# Altium PCB SUNNYMultiAnalyzor.PcbDoc
Units mm, origin at the board's own origin, x right, y up, seen from the top; angles counter-clockwise.
Board outline 150 x 150 mm, 2 copper layers (Top Layer, Bottom Layer); 102 components, 77 nets, 351 pads, 32 vias.
Unrouted connection lines stored in the file: 202.
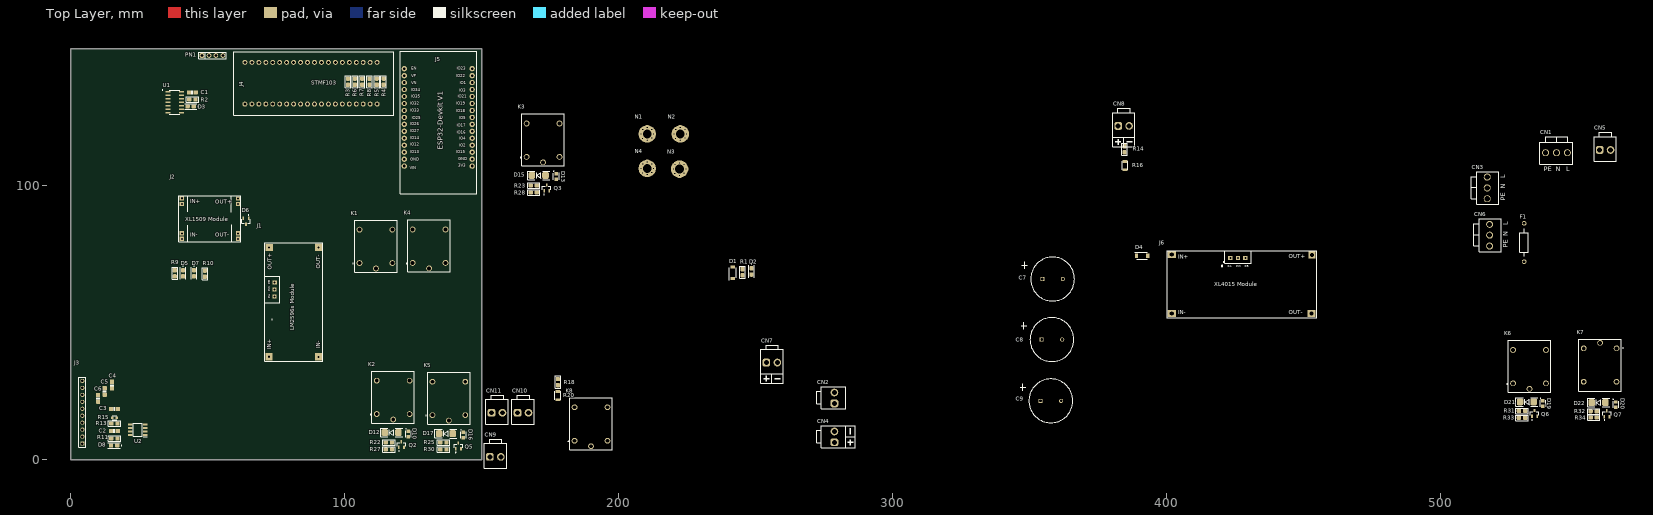
[diagram p0: Top Layer view]
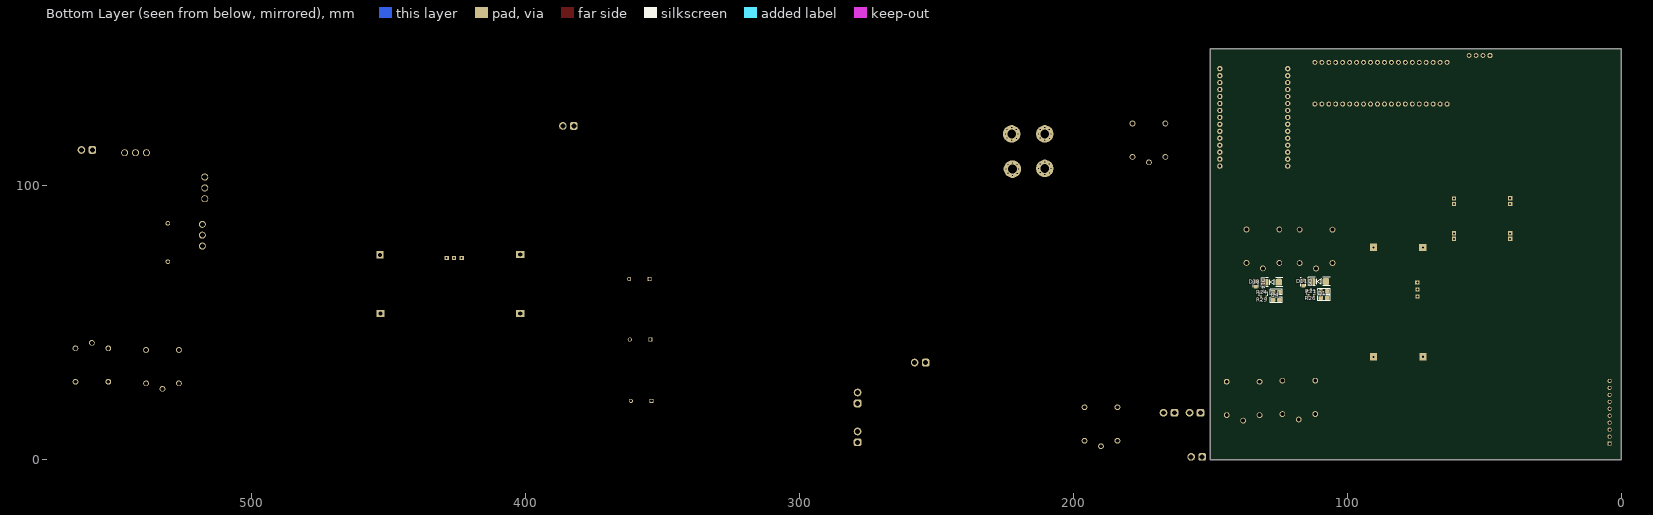
[diagram p1: Bottom Layer view, seen from below]

## Layer stack, top to bottom
Top Solder: solder mask 0.0102, Solder Resist, Dk 3.5
Top Layer: signal copper 0.0356
Dielectric 1: dielectric 0.32, FR-4, Dk 4.8
Bottom Layer: signal copper 0.0356
Bottom Solder: solder mask 0.0102, Solder Resist, Dk 3.5

## Board outline
0,0 150,0 150,150 0,150

## Design rules (kind name [scope] priority, off if disabled: settings)
Clearance [All] p1: gap=0.254 ignorepadtopadclearanceinfootprint=FALSE except(0: Arc-Hole Track-Hole SMDPad-Hole THPad-Hole Via-Hole Fill-Hole Poly-Hole Region-Hole Text-Hole)
Height [All] p1: minheight=0 maxheight=254 prefheight=12.7
PolygonConnect [All] p1: connectstyle=Relief reliefconductorwidth=0.254 reliefentries=4 polygonreliefangle="90 Angle" airgapwidth=0.254
RoutingVias [All] p1: holewidth=0.711 width=1.27 viastyle="Through Hole" minholewidth=0.711 minwidth=1.27 maxholewidth=0.711 maxwidth=1.27
SolderMaskExpansion [All] p1: expansion=0.102 istentingtop=FALSE
Width [All] p1: maxlimit=0.254 minlimit=0.254 preferedwidth=0.254
29 further rules are at their usual default settings.

## Classes and differential pairs
component class Relay: D9 D10 D11 D12 D13 D14 D15 D16 D17 D18 D19 D20 D21 D22 K7 Q1 Q2 Q3 Q4 Q5 Q6 Q7 R21 R22 R23 R24 R25 R26 R27 R28 R29 R30 R31 R32 R33 R34
component class SUNNYMultiAnalyzor: C1 C2 C3 C4 C5 C6 C7 C8 C9 CN1 CN2 CN3 CN4 CN5 CN6 CN7 CN8 CN9 CN10 CN11 D1 D2 D3 D4 D5 D6 D7 D8 F1 J1 J2 J3 J4 J5 J6 K1 K2 K3 K4 K5 K6 K8 N1 N2 N3 N4 PN1 R1 R2 R3 R4 R5 R6 R7 R8 R9 R10 R11 R13 R14 R15 R16 R18 R20 U1 U2

## Components (designator, comment, footprint, x,y, rotation, side; value= is the part's Value field where it differs from the comment)
C1 "0.1uF 50V" CAPC2012X135N 44.402,134.02 r180 top value="0.1uF, 50V Ceramic"
C2 "0.1uF 50V" CAPC2012X135N 15.952,10.478 r0 top value="0.1uF, 50V Ceramic"
C3 "0.1uF 50V" CAPC2012X135N 15.977,18.526 r0 top value="0.1uF, 50V Ceramic"
C4 "0.1uF" CAPC2012X135N 15.092,27.202 r90 top value="0.1uF, 50V Ceramic"
C5 "0.1uF" CAPC2012X135N 12.425,24.916 r90 top value="0.1uF, 50V Ceramic"
C6 "0.1uF" CAPC2012X135N 10.012,22.376 r90 top value="0.1uF, 50V Ceramic"
C7 "3300uF" CAP3300 358.394,65.913 r0 top
C8 "3300uF" CAP3300 358.14,43.815 r0 top
C9 "3300uF" CAP3300 357.759,21.463 r0 top
CN1 "EMER AC" "CON 3P 3.8MM" 546.25,112.014 r180 top
CN2 "PZEM_DATA" "HEADER 2 PIN MOLEX" 278.765,20.511 r90 top
CN3 "TABLET" "CON 3P 3.8MM" 517.017,103.147 r270 top
CN4 "Header LIGHT" "HEADER 2 PIN MOLEX POLE" 278.765,6.287 r90 top
CN5 "CT" "HEADER 2 PIN MOLEX" 558.038,113.03 r0 top
CN6 "AC_SUPPLY" "CON 3P 3.8MM" 517.906,85.875 r270 top
CN7 "Header LIGHT" "HEADER 2 PIN MOLEX POLE" 253.937,35.433 r0 top
CN8 "Header LIGHT" "HEADER 2 PIN MOLEX POLE" 382.334,121.793 r0 top
CN9 "Dummy Load" "Header 2 pin molex" 153,1 r0 top
CN10 "EMER Load" "Header 2 pin molex" 163.1,17.1 r0 top
CN11 "Discharge Load" "Header 2 pin molex" 153.6,17.1 r0 top
D1 "TVS Diode" SOD-128 241.653,68.164 r90 top
D2 "LED" "0805 LED" 248.511,68.672 r270 top
D3 "LED" "0805 LED" 43.804,128.925 r180 top
D4 "VS24VUA1LAMTR" SOD-128 391.033,74.422 r0 top
D5 "LED" "0805 LED" 41,68 r270 top
D6 "TVS" SOT95P237X111-3N 64,87 r270 top
D7 "LED" "0805 LED" 45,68 r270 top
D8 "LED" "0805 LED" 15.85,5.191 r180 top
D9 "LED" "0805 (1205) LED" 116.144,64.487 r270 bottom
D10 "LED" "0805 (1205) LED" 123.236,9.36 r270 top
D11 "M7" DO-214AC 110.324,64.995 r0 bottom
D12 "M7" DO-214AC 117.14,9.868 r180 top
D13 "LED" "0805 (1205) LED" 177.176,103.36 r270 top
D14 "LED" "0805 (1205) LED" 133.44,64.106 r270 bottom
D15 "M7" DO-214AC 170.826,103.741 r180 top
D16 "LED" "0805 (1205) LED" 143.294,8.979 r270 top
D17 "M7" DO-214AC 136.944,9.487 r180 top
D18 "M7" DO-214AC 127.493,64.741 r0 bottom
D19 "LED" "0805 (1205) LED" 537.337,20.447 r270 top
D20 "LED" "0805 (1205) LED" 563.88,20.066 r270 top
D21 "M7" DO-214AC 531.495,21.082 r180 top
D22 "M7" DO-214AC 557.657,20.828 r180 top
F1 "36FG(L)R" "MICRO FUSE - L14MM" 530.479,79.248 r270 top value="1A, 250Vac"
J1 "LM2596s Module" "LM2596S MODULE" 81.462,57.486 r90 top
J2 "XL1509 3.3V Module" "XL1509 MODULE" 51,88 r0 top
J3 "ADS1115" BNO080 4.297,5.866 r90 top
J4 "STM32F103C8T BLUE PILL" "STM32F103 BLUE PILL" 114.4,137.38 r270 top
J5 "ESP32DEVKITV1" ESP32-DEVKITV1_3D 133,130 r90 top
J6 "XL4015 LVCO Module" "XL4015 MODULE" 427.228,64.135 r0 top
K1 "HRS4-S_DC5V_PART" HRS4SDC5V 111.097,77.949 r90 top
K2 "HRS4-S_DC5V_PART" HRS4SDC5V 117.394,22.822 r90 top
K3 "HRS4-S_DC5V_PART" HRS4SDC5V 172.096,116.695 r90 top
K4 "HRS4-S_DC5V_PART" HRS4SDC5V 130.5,78 r90 top
K5 "HRS4-S_DC5V_PART" HRS4SDC5V 137.706,22.441 r90 top
K6 "HRS4-S_DC5V_PART" HRS4SDC5V 532.13,34.036 r90 top
K7 "HRS4-S_DC5V_PART" HRS4SDC5V 558.546,34.417 r270 top
K8 "HRS4-S_DC5V_PART" HRS4SDC5V 189.6,13.1 r90 top
N1 "M3" "M3 hole" 210.439,118.872 r0 top
N2 "M3" "M3 hole" 222.504,118.872 r0 top
N3 "M3" "M3 hole" 222.25,106.045 r0 top
N4 "M3" "M3 hole" 210.439,106.299 r0 top
PN1 "PZEM004T" "1x4P Test PIN" 50.485,147.5 r0 top
Q1 "MMBT2222ALT1G" SOT95P237X111-3N 113.256,60.931 r90 bottom
Q2 "MMBT2222ALT1G" SOT95P237X111-3N 120.719,5.523 r90 top
Q3 "MMBT2222ALT1G" SOT95P237X111-3N 173.747,99.169 r90 top
Q4 "MMBT2222ALT1G" SOT95P237X111-3N 130.552,60.423 r90 bottom
Q5 "MMBT2222ALT1G" SOT95P237X111-3N 141.5,5 r90 top
Q6 "MMBT2222ALT1G" SOT95P237X111-3N 534.289,16.891 r90 top
Q7 "MMBT2222ALT1G" SOT95P237X111-3N 560.705,16.764 r90 top
R1 "2K" "0805 MODIFICADO" 245.209,68.418 r90 top
R2 "330R" "0805 MODIFICADO" 44.427,131.445 r0 top
R3 "4K7" "0805 MODIFICADO" 101.183,137.947 r90 top
R4 "4K7" "0805 MODIFICADO" 114.264,137.947 r90 top
R5 "4K7" "0805 MODIFICADO" 111.724,137.947 r90 top
R6 "4K7" "0805 MODIFICADO" 103.723,137.947 r90 top
R7 "4K7" "0805 MODIFICADO" 106.39,137.947 r90 top
R8 "4K7" "0805 MODIFICADO" 109.057,137.947 r90 top
R9 "2K" "0805 MODIFICADO" 38,68 r90 top
R10 "330R" "0805 MODIFICADO" 49,67.875 r90 top
R11 "330R" "0805 MODIFICADO" 15.977,7.731 r180 top
R13 "330R" "0805 MODIFICADO" 15.977,13.192 r180 top
R14 "22K" "0805 MODIFICADO" 384.683,113.284 r90 top
R15 "680R" "0603 RESISTOR" 16.012,15.302 r0 top
R16 "3K3" "1206 RESISTOR" 384.81,107.315 r270 top
R18 "22K" "0805 MODIFICADO" 177.816,28.301 r270 top
R20 "3K3" "1206 RESISTOR" 177.816,23.348 r270 top
R21 "330R" "0805 MODIFICADO" 108.557,61.439 r0 bottom
R22 "330R" "0805 MODIFICADO" 116.154,6.312 r180 top
R23 "330R" "0805 MODIFICADO" 169.048,100.058 r180 top
R24 "330R" "0805 MODIFICADO" 125.98,61.185 r0 bottom
R25 "330R" "0805 MODIFICADO" 136.044,6.312 r180 top
R26 "4K7" "0805 MODIFICADO" 108.557,59.026 r180 bottom
R27 "4K7" "0805 MODIFICADO" 116.154,3.772 r0 top
R28 "4K7" "0805 MODIFICADO" 169.048,97.518 r180 top
R29 "4K7" "0805 MODIFICADO" 125.98,58.264 r0 bottom
R30 "4K7" "0805 MODIFICADO" 136.044,3.65 r180 top
R31 "330R" "0805 MODIFICADO" 529.717,17.78 r180 top
R32 "330R" "0805 MODIFICADO" 555.879,17.653 r180 top
R33 "4K7" "0805 MODIFICADO" 529.717,15.24 r180 top
R34 "4K7" "0805 MODIFICADO" 555.879,15.367 r180 top
U1 "MCP42010-E/SL" SOIC127P600X175-14N 37.955,130.46 r0 top
U2 "ACS712ELCTR-05B-T" SOIC127P600X175-8N 24.486,10.906 r180 top

## Footprints (in the part's own frame and the unit in brackets; to place one, negate y for a bottom-side part, rotate by r counter-clockwise, add the part's x,y. Pads: shape width x height; smd on the part's side, far side on the other; paste and mask are expansions set on the pad)
"1x4P Test PIN" [mm] "Connector Header, Single-row 4-position, 0.100\" pitch"
  rrect50% 1.72x1.72 hole 1.02: 1(-2.54,0)
  round 1.72 hole 1.02: 2(0.025,0) 3(2.515,0) 4(5.08,0)
  silkscreen extent -3.81,-1.27 6.35,1.27, body extent -3.69,-1.15 6.23,1.15, height 5
"0603 RESISTOR" [mm]
  rrect20% 0.94x1.02 smd: 1(-0.79,0) 2(0.79,0)
  silkscreen extent -0.8,-0.69 0.8,0.69, body extent -0.8,-0.45 0.8,0.45, height 0.77
"0805 (1205) LED" [mm]
  rect 1.25x1.3 smd: 1(-0.975,0) 2(0.975,0)
  silkscreen extent -2,-0.96 1.14,0.96, body extent -1,-0.65 1,0.65, height 0.9
"0805 LED" [mm] "Chip Resistor, Empaque 0805"
  rrect50% 1.6x1.5 smd: 1(-1.125,0) 2(1.125,0)
  silkscreen extent -2.84,-1 2.25,1, body extent -1,-0.62 1.03,0.63, height 1.1
"0805 MODIFICADO" [mm] "Chip Resistor, Empaque 0805"
  rrect50% 1.6x1.5 smd: 1(-1.125,0) 2(1.125,0)
  silkscreen extent -2.25,-1 2.25,1, body extent -1,-0.62 1,0.62, height 0.78
"1206 RESISTOR" [mm]
  rrect14% 1.09x1.77 smd: 1(-1.465,0)
  rrect14% 0.94x1.77 smd: 2(1.54,0)
  silkscreen extent -1.55,-1.06 1.55,1.06, body extent -1.55,-0.77 1.55,0.77, height 0.28
BNO080 [mm] "Header 1x10"
  rect 1.5x1.5 hole 0.9: 1(0,0)
  round 1.5 hole 0.9: 2(2.54,0) 3(5.08,0) 4(7.62,0) 5(10.16,0) 6(12.7,0) 7(15.24,0) 8(17.78,0) 9(20.32,0) 10(22.86,0)
  silkscreen extent -1.27,-1.27 24.13,1.27, body extent -2.64,-15.16 25.3,2.11, height 10.54
CAP3300 [mm]
  round 1.508 hole 1: N(3.75,0)
  rect 1.508x1.508 / inner round 1.508 / far side rect 1.508x1.508 hole 1: P(-3.75,0)
  silkscreen extent -11.25,-8 8,8, body extent -8.97,-9.03 9,8.97, height 36
CAPC2012X135N [mm] "Chip Capacitor, Body 2.0x1.2mm, EIA 0805, IPC Medium Density"
  round 0.254 on Mech15: 0(0,0)
  rrect25% 1.6x1.5 smd: 1(-1.2,0) 2(1.2,0)
  Top Layer pour cut-out: -0.675,0.7 -0.475,0.9 0.475,0.9 0.675,0.7 0.675,-0.7 0.475,-0.9 -0.475,-0.9 -0.675,-0.7
  silkscreen extent -0.15,-0.65 0.15,0.65, body extent -1.1,-0.72 1.1,0.73, height 1.34
"CON 3P 3.8MM" [mm]
  round 2.55 hole 1.85: 1(0,0) 2(3.96,0)
  round 2.55 hole 1.85 copper offset 0,0: 3(7.92,0.001)
  silkscreen extent -2,-5.76 10,4.25, body extent -1.86,-5.5 9.9,4, height 14.4
DO-214AC [mm]
  rrect50% 2.4x2.56 smd: A(-2.488,-0.008)
  rrect50% 2.4x2.5 smd: K(2.488,0.008)
  silkscreen extent -3.99,-1.59 4,1.6, body extent -2.54,-1.32 2.66,1.28
ESP32-DEVKITV1_3D [mm]
  round 1.93 hole 1: 1(-22.87,-13.54) 2(-20.33,-13.54) 3(-17.79,-13.54) 4(-15.25,-13.54) 5(-12.71,-13.54) 6(-10.17,-13.54) 7(-7.63,-13.54) 8(-5.09,-13.54) 9(-2.55,-13.54) 10(-0.01,-13.54) 11(2.53,-13.54) 12(5.07,-13.54) 13(7.61,-13.54) 14(10.15,-13.54) 15(12.69,-13.54) 16(12.69,11.23) 17(10.15,11.23) 18(7.61,11.23) 19(5.07,11.23) 20(2.53,11.23) 21(-0.01,11.23) 22(-2.55,11.23) 23(-5.09,11.23) 24(-7.63,11.23) 25(-10.17,11.23) 26(-12.71,11.23) 27(-15.25,11.23) 28(-17.79,11.23) 29(-20.33,11.23) 30(-22.87,11.23)
  silkscreen extent -33,-15.2 19,12.7, body extent -32.69,-15.7 18.24,12.8, height 14.6
"HEADER 2 PIN MOLEX" [mm]
  rrect50% 2.8x2.8 hole 1.8: 1(0,0)
  round 2.8 hole 1.8: 2(4,0)
  silkscreen extent -2.03,-4.11 6.1,6.4, body extent -1.9,-3.95 5.9,5.55, height 14.4
"Header 2 pin molex" [mm]
  rrect50% 2.8x2.8 hole 1.8: 1(0,0)
  round 2.8 hole 1.8: 2(4,0)
  silkscreen extent -2.03,-4.11 6.1,6.4, body extent -1.9,-3.95 5.9,5.55, height 14.4
"HEADER 2 PIN MOLEX POLE" [mm]
  rrect50% 2.8x2.8 hole 1.8: 1(0,0)
  round 2.8 hole 1.8: 2(4,0)
  silkscreen extent -2.03,-7.62 6.1,6.4, body extent -1.9,-3.95 5.9,5.55, height 14.4
HRS4SDC5V [mm]
  round 2.1 hole 1.4: 1(-6.2,5.675) 2(6,5.675) 3(6,-6.325) 4(-6.2,-6.325) 5(-8.2,-0.325)
  silkscreen extent -9.5,-8.08 9.5,8.07, body extent -9.5,-8.08 9.5,7.42, height 16.1
"LM2596S MODULE" [mil]
  rect 104.33x104.33 hole 30: 0(-784.88,357.16) 1(-786.1,-352.66) 5(785,354.38) 6(787.97,-355.84)
  rect 60x60 hole 30: 2(80.96,275.85) 3(181.96,275.85) 4(284.27,275.21)
  silkscreen extent -850,-418 850,419, body extent -850,-418 850,418, height 526
"M3 hole" [mm]
  round 6.4 hole 3.25 mask+1.5: M(0,0)
  Top Layer pour cut-out: -0.132,4.78 -0.737,4.724 -1.295,4.597 -2.108,4.293 -2.818,3.885 -3.378,3.404 -3.834,2.869 -4.229,2.248 -4.497,1.616 -4.674,0.984 -4.769,0.305 -4.769,-0.353 -4.674,-0.965 -4.521,-1.575 -4.267,-2.134 -3.962,-2.692 -3.569,-3.175 -3.023,-3.721 -2.261,-4.229 -1.397,-4.572 -0.406,-4.75 0.457,-4.75 1.372,-4.572 2.248,-4.229 3.01,-3.721 3.556,-3.175 4.013,-2.591 4.42,-1.803 4.674,-0.965 4.775,-0.076 4.724,0.787 4.42,1.854 3.81,2.896 3.048,3.708 2.159,4.293 1.092,4.648
  Bottom Layer pour cut-out: -0.132,4.78 -0.737,4.724 -1.295,4.597 -2.108,4.293 -2.818,3.885 -3.378,3.404 -3.834,2.869 -4.229,2.248 -4.497,1.616 -4.674,0.984 -4.769,0.305 -4.769,-0.353 -4.674,-0.965 -4.521,-1.575 -4.267,-2.134 -3.962,-2.692 -3.569,-3.175 -3.023,-3.721 -2.261,-4.229 -1.397,-4.572 -0.406,-4.75 0.457,-4.75 1.372,-4.572 2.248,-4.229 3.01,-3.721 3.556,-3.175 4.013,-2.591 4.42,-1.803 4.674,-0.965 4.775,-0.076 4.724,0.787 4.42,1.854 3.81,2.896 3.048,3.708 2.159,4.293 1.092,4.648
  body extent -2.81,-2.8 2.79,2.8, height 4.92
"MICRO FUSE - L14MM" [mm]
  round 1.7 hole 1: 1(-7,0) 2(7,0)
  silkscreen extent -5,-1.5 5,1.5, body extent -6.8,-1.9 6.8,1.9, height 3.9
SOD-128 [mm]
  rect 1.12x1.72 smd: 1(-2.075,0) 2(2.075,0)
  silkscreen extent -2.64,-1.25 1.85,1.25, body extent -2.35,-1.25 2.35,1.25, height 1.05
SOIC127P600X175-8N [mm]
  rect 1.525x0.65 smd: 1(-2.712,1.905) 2(-2.712,0.635) 3(-2.712,-0.635) 4(-2.712,-1.905) 5(2.712,-1.905) 6(2.712,-0.635) 7(2.712,0.635) 8(2.712,1.905)
  silkscreen extent -3.47,-2.45 1.6,2.58, body extent -3,-2.45 3,2.45, height 1.75
SOIC127P600X175-14N [mm]
  rrect25% 1.9x0.6 smd: 1(-2.455,3.81) 2(-2.455,2.54) 3(-2.455,1.27) 4(-2.455,0) 5(-2.455,-1.27) 6(-2.455,-2.54) 7(-2.455,-3.81) 8(2.455,-3.81) 9(2.455,-2.54) 10(2.455,-1.27) 11(2.455,0) 12(2.455,1.27) 13(2.455,2.54) 14(2.455,3.81)
  silkscreen extent -4.45,-4.43 1.95,4.51, body extent -2.95,-4.32 3.05,4.32, height 1.75
SOT95P237X111-3N [mm]
  rrect25% 1.23x0.6 smd: 1(-1.06,0.95) 2(-1.06,-0.95) 3(1.06,0)
  silkscreen extent -2.46,-1.56 0.65,1.56, body extent -1.35,-1.45 1.05,1.45, height 1.15
"STM32F103 BLUE PILL" [mm] "STM32 BLUE PILL"
  round 1.8 hole 1.1: 1(-7.62,-2.54) 2(-7.62,-5.08) 3(-7.62,-7.62) 4(-7.62,-10.16) 5(-7.62,-12.7) 6(-7.62,-15.24) 7(-7.62,-17.78) 8(-7.62,-20.32) 9(-7.62,-22.86) 10(-7.62,-25.4) 11(-7.62,-27.94) 12(-7.62,-30.48) 13(-7.62,-33.02) 14(-7.62,-35.56) 15(-7.62,-38.1) 16(-7.62,-40.64) 17(-7.62,-43.18) 18(-7.62,-45.72) 19(-7.62,-48.26) 20(-7.62,-50.8) 21(7.62,-50.8) 22(7.62,-48.26) 23(7.62,-45.72) 24(7.62,-43.18) 25(7.62,-40.64) 26(7.62,-38.1) 27(7.62,-35.56) 28(7.62,-33.02) 29(7.62,-30.48) 30(7.62,-27.94) 31(7.62,-25.4) 32(7.62,-22.86) 33(7.62,-20.32) 34(7.62,-17.78) 35(7.62,-15.24) 36(7.62,-12.7) 37(7.62,-10.16) 38(7.62,-7.62) 39(7.62,-5.08) 40(7.62,-2.54)
  silkscreen extent -11.43,-54.79 11.71,3.61, body extent -11.2,-54.43 11.8,3.37, height 16.6
"XL1509 MODULE" [mil]
  rect 60x60 hole 30: 0(-410.41,210.48) 0(-410.41,290.8) 1(-410.41,-291.49) 1(-410.41,-212.75) 2(397,210.48) 2(397,289.22) 3(397,-291.49) 3(397,-212.75)
  silkscreen extent -451,-332 436,331, body extent -450,-336 434,330, height 220
"XL4015 MODULE" [mm]
  rect 3x2.5 hole 1.5: 0(-25.332,10.691) 1(-25.349,-10.846) 6(25.663,-10.841)
  rect 1.524x1.524 hole 0.762: 2(-3.974,9.481) 3(-1.206,9.481) 4(1.495,9.464)
  rect 2.65x2.65 hole 1.5: 5(25.839,10.609)
  silkscreen extent -27.12,-12.36 27.51,12.06, body extent -26.84,-12.09 27.16,11.93, height 15.03

## Part data
C1 C2 C3 C4 C5 C6: library part "Capacitor SMD Ceramic Chip Cap 0.1uF 50V (0805) (AVX)", "Capacitor SMD Ceramic Chip Cap 0.1uF 50V (0805) (AVX)", RMPN=RMELCCAPSC001, Created by="Zion Blue", Published="28 April 2014", Publisher="Cynetik Group", RM DESC="Capacitor SMD Ceramic Chip Cap 0.1uF 50V (0805) (AVX)"
C7 C8 C9: library part "Electrolytic Capacitor", "3300 uF / 50 Vdc"
CN1 CN3 CN6: library part "Con 112002ST/RH 3.96mm 2P V-PLUG_1", "Connector 3.9mm. 3PINS WAFER STRAIGHT PIN (MALE)", Manufacturer=GTK, MPN=112002ST/RH, RMPN=RMELCCNT006, ComponentLink1Description="ES LINK", ComponentLink1URL=https://www.es.co.th/detail.asp?Prod=000709322, ESPN=0007-0932-2, M DESC="WAFER Connector 2 Pins,Pitch 3.96mm, Straight Type", RM DESC="Connector 3.9mm. 2PINS WAFER STRAIGHT PIN (MALE)"
CN2 CN5 CN9 CN10 CN11: library part "Header LIGHT", "Connector 3.96MM 02 PIN WAFER STRAIGHTPIN (MALE)"
CN4 CN7 CN8: library part "CON Header LIGHT Pole", "Connector 3.96MM 02 PIN WAFER STRAIGHTPIN (MALE)"
D1: library part "TVS Diode VS6V0UA1LAMTR", "TVS Diode VS6V0UA1LAMTR . Breakdown Voltage = 7.02 V , Clamping Voltage 10.3 V , Working Reverse Standoff Voltage 6V", Code_JEDEC=DO-204-AL, ComponentLink1Description="Manufacturer Link", ComponentLink1URL=http://www.fairchildsemi.com/, ComponentLink2Description=Datasheet, ComponentLink2URL=http://www.fairchildsemi.com/ds/1N%2F1N4001.pdf, DatasheetVersion=1998, LatestRevisionDate=17-Jul-2002, LatestRevisionNote="Re-released for DXP Platform.", PackageDescription="Diode, Axial; Body 5.2 x 2.7 mm (LxDia. max), Lead Dia. 0.86 mm (max)", PackageReference=DO-41, PackageVersion=Aug-1999, Published=8-Jun-2000, Publisher="Altium Limited"
D2 D3 D5 D7 D8 D9 D10 D13 D14 D16 D19 D20: library part "LED RED (SMD)", "LED SMD  mcd,Red Color Red Diffused Lens"
D4: library part "TVS Diode VS24VUA1LAMTR", "TVS Diode VS24VUA1LAMTR . Breakdown Voltage = 28.1 V , Clamping Voltage 38.9 V , Working Reverse Standoff Voltage 24V", Code_JEDEC=DO-204-AL, ComponentLink1Description="Manufacturer Link", ComponentLink1URL=http://www.fairchildsemi.com/, ComponentLink2Description=Datasheet, ComponentLink2URL=http://www.fairchildsemi.com/ds/1N%2F1N4001.pdf, DatasheetVersion=1998, LatestRevisionDate=17-Jul-2002, LatestRevisionNote="Re-released for DXP Platform.", PackageDescription="Diode, Axial; Body 5.2 x 2.7 mm (LxDia. max), Lead Dia. 0.86 mm (max)", PackageReference=DO-41, PackageVersion=Aug-1999, Published=8-Jun-2000, Publisher="Altium Limited"
D6: library part "TVS Diode MMBZ6V8ALT1G", "46V Clamp 870mA Ipp Tvs Diode Surface Mount SOT-23-3 (TO-236)", Package=None, Availability=Unavailable, MP=MMBZ6V8ALT1G, Price=None
D11 D12 D15 D17 D18 D21 D22: library part "Diode M7", "M7 Rectifier Diode 1000V/1A . Package  DO-214AC (SMA)", Code_JEDEC=DO-204-AL, ComponentLink1Description="Manufacturer Link", ComponentLink1URL=http://www.fairchildsemi.com/, ComponentLink2Description=Datasheet, ComponentLink2URL=http://www.fairchildsemi.com/ds/1N%2F1N4001.pdf, DatasheetVersion=1998, LatestRevisionDate=17-Jul-2002, LatestRevisionNote="Re-released for DXP Platform.", PackageDescription="Diode, Axial; Body 5.2 x 2.7 mm (LxDia. max), Lead Dia. 0.86 mm (max)", PackageReference=DO-41, PackageVersion=Aug-1999, Published=8-Jun-2000, Publisher="Altium Limited"
F1: library part "Fuse 36FG(L)R 1A On pcb", "Fuse Microfuse, 1A/250Vac, Fast Acting (Normal Blow) P/N : 36FG(L)R (SLEEK)", Manufacturer=SLEEK, RMPN=RMELCFUSA001, ComponentLink1Description="Link ES", ComponentLink1URL=https://www.es.co.th/detail.asp?prod=056200010, ComponentLink2Description=Datasheet, ComponentLink2URL=https://www.es.co.th/Schemetic/PDF/36FG-SLEEK.PDF, ESPN=0562-0001-0, MPN=36FG(L)R, Published=14-May-2014, Publisher="Cynetik Group", Revised="Zion Blue", RM DESC="Fuse หางหนู Microfuse, 1A/250Vac, Fast Acting (Normal Blow) P/N : 36FG(L)R (SLEEK)"
J1: library part "LM2596s Module 5A", "LM2596s Module step down converter"
J2: library part "XL1509 Module", "XL1509 Module step down converter"
J3: "ADC Sensor", LatestRevisionDate=17-Jul-2002, LatestRevisionNote="Re-released for DXP Platform.", Publisher="Altium Limited"
J4: library part "STM32 BULE PILL", "STM32F103C8T BULE PILL"
J5: "Dual core, Wi-Fi: 2.4 GHz up to 150 Mbits/s,BLE (Bluetooth Low Energy) and legacy Bluetooth, 32 bits, Up to 240 MHz", Package=Package, Availability=Unavailable, Check_prices=https://www.snapeda.com/parts/ESP32%20DEVKIT%20V1/Do%20it/view-part/5659245/?ref=eda, MF="Do it", MP="ESP32 DEVKIT V1", Price=None, SnapEDA_Link=https://www.snapeda.com/parts/ESP32%20DEVKIT%20V1/Do%20it/view-part/5659245/?ref=snap
J6: library part "XL4015 Module 5A", "XL4015 Module step down converter for Low Voltage Cut Off Check(LVCO)"
K1 K2 K3 K4 K5 K6 K7 K8: "Relay or Contactor", Manufacturer_Name=MULTICOMP, Manufacturer_Part_Number="HRS4-S DC5V", Datasheet Link=http://www.farnell.com/datasheets/1306711.pdf, Height=16mm
N1 N2 N3 N4: library part "M3 hole", "น็อต JT หัวร่ม สกรูมิลสี่แฉก M3x6", RMPN=RMRMANUTCJTZ011
PN1: library part "PIN Header 1X4", "Connector Pin Header 4 Pins,Pitch 2.54mm. P/N : PHSS04G10/RH (GTK)", ComponentLink1Description="Link ES", ComponentLink1URL=https://www.es.co.th/detail.asp?Prod=000703471, ComponentLink2Description=Datasheet, ComponentLink2URL=https://www.es.co.th/Schemetic/PDF/PHSSXXG10.PDF
Q1 Q2 Q3 Q4 Q5 Q6 Q7: "Bipolar (BJT) Transistor NPN 40 V 600 mA 300MHz 225 mW Surface Mount SOT-23-3 (TO-236)", Package="SOT-23-3 ON Semiconductor", Availability="In Stock", Check_prices=https://www.snapeda.com/parts/MMBT2222ALT1G/Onsemi/view-part/?ref=eda, MF="ON Semiconductor", MP=MMBT2222ALT1G, Price=None, Purchase-URL=https://pricing.snapeda.com/search/part/MMBT2222ALT1G/?ref=eda, SnapEDA_Link=https://www.snapeda.com/parts/MMBT2222ALT1G/Onsemi/view-part/?ref=snap
R1 R2 R3 R4 R5 R6 R7 R8 R9 R10 R11 R13 R14 R15 R16 R18 R20 R21 R22 R23 R24 R25 R26 R27 R28 R29 R30 R31 R32: library part "Resistor SMD 330R +/- 1% (CHIP)", "'RES SMD 330 OHM 5% 1/8W 0805/0805W8F3300T5E", RMPN=RMELCRSTS010
R33: library part "Resistor SMD 330R +/- 1% (CHIP)", "'RES SMD 4700 OHM 5% 1/8W 0805/0805W8F3300T5E", RMPN=RMELCRSTS010
R34: library part "Resistor SMD 330R +/- 1% (CHIP)", "'RES SMD 4K7 5% 1/8W 0805/0805W8F3300T5E", RMPN=RMELCRSTS010
U1: "Digital Potentiometer 10k Ohm 2 Circuit 256 Taps SPI Interface 14-SOIC", Package="SOIC-14 Microchip", Availability=Unavailable, MF=Microchip, MP=MCP42010-E/SL, Price=None, SnapEDA_Link=https://www.snapeda.com/parts/MCP42010-E/SL/Microchip/view-part/386175/?ref=snap
U2: "Current Sensor 5A 1 Channel Hall Effect, Open Loop Bidirectional 8-SOIC (0.154, 3.90mm Width)", Package="SOIC-8 Allegro MicroSystems LLC", Availability="In Stock", Check_prices=https://www.snapeda.com/parts/ACS712ELCTR-05B-T/Allegro+MicroSystems+LLC/view-part/?ref=eda, MF="Allegro MicroSystems LLC", MP=ACS712ELCTR-05B-T, Price=None, Purchase-URL=https://pricing.snapeda.com/search/part/ACS712ELCTR-05B-T/?ref=eda, SnapEDA_Link=https://www.snapeda.com/parts/ACS712ELCTR-05B-T/Allegro+MicroSystems+LLC/view-part/?ref=snap

## Via types
v1: diameter 0.8, hole 0.4, Top Layer to Bottom Layer, 32 vias

## Nets (pads, with @x,y where several pads share a name; then routed paths per layer and width w, separated by ;. In a path a pad name is that pad's centre, name@x,y a point inside that pad or via, vN(x,y) a via of type N, cw(c..) or ccw(c..) an arc to the next point about the centre after c; other vN are vias at no path point)
+3.3: C1.2 D6.2 J2.2 J3.1 PN1.1 R2.1 R3.1 R4.1 R5.1 R6.1 R7.1 R8.1 R10.2 U1.14
+5: C2.2 D1.2 D11.K D12.K D15.K D17.K D18.K D21.K D22.K J1.5 J4.21 J5.30 K1.1 K2.1 K3.1 K4.1 K5.1 K6.1 K7.1 R1.2 R11.1 R21.2 R22.2 R23.2 R24.2 R25.2 R31.2 R32.2 U2.8
+24: CN4.1 D4.2 J1.0 J2.0 J6.0 R9.2
"AC EARTH": CN1.3 CN3.3 CN6.3
"AC LINE": CN3.1 CN6.1 F1.1
"AC LINE DATA": CN1.1 CN2.1 CN5.2
"AC NEUTRAL": CN1.2 CN2.2 CN3.2 CN6.2
"AC ON/OFF": J4.17 R34.2
"ADS SDA": J3.4 J4.36
ADS_SCL: J3.3 J4.35
BASE: Q2.1 R27.1
"BATT ADC": C5.2 J3.9 R14.1 R16.2
BATT_IN: CN8.1 K6.5
"Capacitor Charging Systerm +": C7.N C8.N C9.N CN11.2 K1.2
"Capacitor Charging Systerm -": CN10.1 K2.2
COIL2_K6: D19.1 D21.A K6.4 Q6.3
"CT OUT": CN5.1 K8.5
"CURRENT IC ADC": C4.2 J3.10 R13.2 R15.1
"CURRENT SENSOR 5.0(REF)": R13.1 U2.7
"EMER BOARD ADC": C6.2 J3.8 R18.2 R20.1
GND: C1.1 C2.1 C3.1 C4.1 C5.1 C6.1 CN4.2 CN7.2 CN8.2 CN9.2 D1.1 D2.1 D3.1 D4.1 D5.1 D6.3 D7.1 D8.1 J1.1 J1.6 J2.1 J2.3 J3.2 J4.19 J4.39 J4.40 J5.2 J5.29 J6.1 K4.5 PN1.4 Q1.2 Q2.2 Q3.2 Q4.2 Q5.2 Q6.2 Q7.2 R15.2 R16.1 R20.2 U1.4 U2.5
IP+: K5.5 R18.1 U2.1 U2.2
IP-: CN7.1 U2.3 U2.4
"K1 TRIG": J4.15 R26.2
"K2 TRIG": J4.14 R27.2
"K3 TRIG": J4.13 R28.2
"K4 TRIG": J4.12 R29.2
"K5 TRIG": J4.11 R30.2
"Lov Voltage Cut Off +": J6.5 K2.3
"Low Voltage Cut Off -": J6.6 K1.3
"MCP C\S\\": J4.29 R3.2 U1.1
"MCP R\S\\": R4.2 U1.11
"MCP RS": J4.34
"MCP S\H\D\N\\": R5.2 U1.12
"MCP SHDN": J4.33
"MCP SO": J4.31 R7.2 U1.13
MCP_SCK: J4.30 R6.2 U1.2
MCP_SI: J4.32 R8.2 U1.3
NetC3_2: C3.2 U2.6
NetC7_P: C7.P C8.P C9.P CN10.2 K3.3
NetCN11_1: CN11.1 K3.5
NetD2_2: D2.2 R1.1
NetD3_2: D3.2 R2.2
NetD5_2: D5.2 R9.1
NetD7_2: D7.2 R10.1
NetD8_2: D8.2 R11.2
NetD9_1: D9.1 D11.A K1.4 Q1.3
NetD9_2: D9.2 R21.1
NetD10_1: D10.1 D12.A K2.4 Q2.3
NetD10_2: D10.2 R22.1
NetD13_1: D13.1 D15.A K3.4 Q3.3
NetD13_2: D13.2 R23.1
NetD14_1: D14.1 D18.A K4.4 Q4.3
NetD14_2: D14.2 R24.1
NetD16_1: D16.1 D17.A K5.4 Q5.3
NetD16_2: D16.2 R25.1
NetD19_2: D19.2 R31.1
NetD20_1: D20.1 D22.A K7.4 Q7.3
NetD20_2: D20.2 R32.1
NetF1_2: F1.2 K8.3
NetK1_5: K1.5 K4.3
NetK2_5: K2.5 K5.3
NetQ1_1: Q1.1 R26.1
NetQ3_1: Q3.1 R28.1
NetQ4_1: Q4.1 R29.1
NetQ5_1: Q5.1 R30.1
NetQ6_1: Q6.1 R33.1
NetQ7_1: Q7.1 R34.1
PA: J6.2 U1.8
PB: J6.4 U1.10
PW: J6.3 U1.9
"RELAY VIRTUAL BATTERY TRICK": J4.16 R33.2
"RX PZEM": J4.28 PN1.3
RX_ESP/TX_STM32: J4.6 J5.6
"TX PZEM": J4.27 PN1.2
TX_ESP/RX_STM32: J4.7 J5.7
V_BATT_IN: CN9.1 K6.3 R14.2
pads on no net: C1.0 C2.0 C3.0 C4.0 C5.0 C6.0 D6.1 J1.2 J1.3 J1.4 J3.5 J3.6 J3.7 J4.1 J4.2 J4.3 J4.4 J4.5 J4.8 J4.9 J4.10 J4.18 J4.20 J4.22 J4.23 J4.24 J4.25 J4.26 J4.37 J4.38 J5.1 J5.3 J5.4 J5.5 J5.8 J5.9 J5.10 J5.11 J5.12 J5.13 J5.14 J5.15 J5.16 J5.17 J5.18 J5.19 J5.20 J5.21 J5.22 J5.23 J5.24 J5.25 J5.26 J5.27 J5.28 K3.2 K4.2 K5.2 K6.2 K7.2 K7.3 K7.5 K8.1 K8.2 K8.4 N1.M N2.M N3.M N4.M U1.5 U1.6 U1.7
copper on no net:
  other v1: 222.25,103.759 210.439,104.013 220.472,104.394 223.901,104.521 208.661,104.648 212.09,104.775 219.964,106.045 224.536,106.045 208.153,106.299 212.725,106.299 220.599,107.696 223.901,107.696 208.788,107.95 212.09,107.95 222.25,108.331 210.439,108.585 210.439,116.586 222.504,116.586 208.661,117.221 220.726,117.221 212.09,117.348 224.155,117.348 208.153,118.872 212.725,118.872 220.218,118.872 224.79,118.872 208.788,120.523 212.09,120.523 220.853,120.523 224.155,120.523 210.439,121.158 222.504,121.158

## Silkscreen, mask and mechanical layers (free items; w line width, h text height)
Mechanical 1:
  the board outline again, w0.5

## Text inside footprints (layer, text, board x,y; h text height)
CN1: Top Overlay "PE" at 537.65,104.614 h3; Top Overlay "N" at 541.95,104.614 h3; Top Overlay "L" at 545.85,104.614 h3
CN3: Top Overlay "PE" at 524.417,94.547 h3 r90; Top Overlay "N" at 524.417,98.847 h3 r90; Top Overlay "L" at 524.417,102.747 h3 r90
CN6: Top Overlay "PE" at 525.306,77.275 h3 r90; Top Overlay "N" at 525.306,81.575 h3 r90; Top Overlay "L" at 525.306,85.475 h3 r90
J1: Top Overlay "IN-" at 91.02,40.585 h1.52 r90; Top Overlay "OUT+" at 73.368,69.247 h1.52 r90; Top Overlay "OUT-" at 91.063,69.743 h1.52 r90; Top Overlay "PA" at 72.902,58.832 h0.76 r90; Top Overlay "IN+" at 73.193,40.322 h1.52 r90; Top Overlay "PW" at 72.902,61.448 h0.76 r90; Top Overlay "PB" at 72.927,64.039 h0.76 r90
J2: Top Overlay "OUT+" at 52.753,93.41 h1.52; Top Overlay "IN+" at 43.659,93.6 h1.52; Top Overlay "IN-" at 43.659,81.269 h1.52; Top Overlay "XL1509 Module" at 41.78,86.933 h1.52; Top Overlay "OUT-" at 52.753,81.269 h1.52
J4: Top Overlay "STMF103" at 87.806,136.821 h1.52
J5: Top Overlay "ESP32-Devkit V1" at 135.794,113.109 h1.93 r90; Top Overlay "IO12" at 124,114.5 h1.02; Top Overlay "IO13" at 124,111.75 h1.02; Top Overlay "GND" at 124,109 h1.02; Top Overlay "VIN" at 123.75,106 h1.02; Top Overlay "IO23" at 141,142.25 h1.02; Top Overlay "IO22" at 140.75,139.5 h1.02; Top Overlay "IO1" at 142,137 h1.02; Top Overlay "IO3" at 141.75,134.25 h1.02; Top Overlay "IO21" at 141.25,132 h1.02; Top Overlay "IO19" at 140.75,129.5 h1.02; Top Overlay "IO18" at 140.75,126.75 h1.02; Top Overlay "IO5" at 141.75,124.25 h1.02; Top Overlay "IO17" at 141,121.5 h1.02; Top Overlay "IO16" at 141,119 h1.02; Top Overlay "IO4" at 141.75,116.75 h1.02; Top Overlay "IO2" at 141.75,114.25 h1.02; Top Overlay "IO15" at 140.747,111.839 h1.02; Top Overlay "GND" at 141.479,109.324 h1.02; Top Overlay "3V3" at 141.479,106.824 h1.02; Top Overlay "EN" at 124.25,142.25 h1.02; Top Overlay "VP" at 124.25,139.5 h1.02; Top Overlay "VN" at 124.25,137 h1.02; Top Overlay "IO34" at 124.25,134.5 h1.02; Top Overlay "IO35" at 124.25,132 h1.02; Top Overlay "IO32" at 124,129.5 h1.02; Top Overlay "IO33" at 124,127 h1.02; Top Overlay "IO25" at 124.5,124.25 h1.02; Top Overlay "IO26" at 124,122 h1.02; Top Overlay "IO27" at 124,119.5 h1.02; Top Overlay "IO14" at 124,117 h1.02; Mechanical 13 "ESP32-DEVKITV1" at 150.24,135 h1.27 r90
J6: Top Overlay "XL4015 Module" at 417.449,63.221 h1.52; Top Overlay "PB" at 428.473,70.206 h0.76; Top Overlay "PW" at 425.399,70.18 h0.76; Top Overlay "IN+" at 404.161,73.35 h1.52; Top Overlay "PA" at 422.25,70.129 h0.76; Top Overlay "OUT-" at 444.593,53.018 h1.52; Top Overlay "OUT+" at 444.537,73.546 h1.52; Top Overlay "IN-" at 404.292,53.01 h1.52